# EAGLE board disp board (EAGLE 7.3.0)
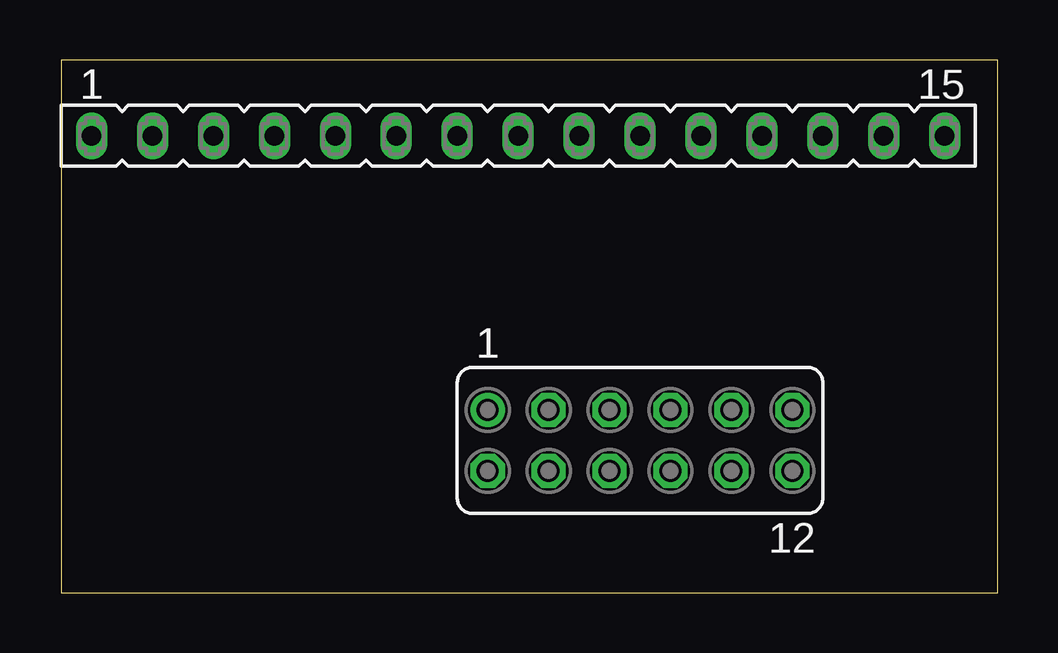
[diagram p0: board, top side]
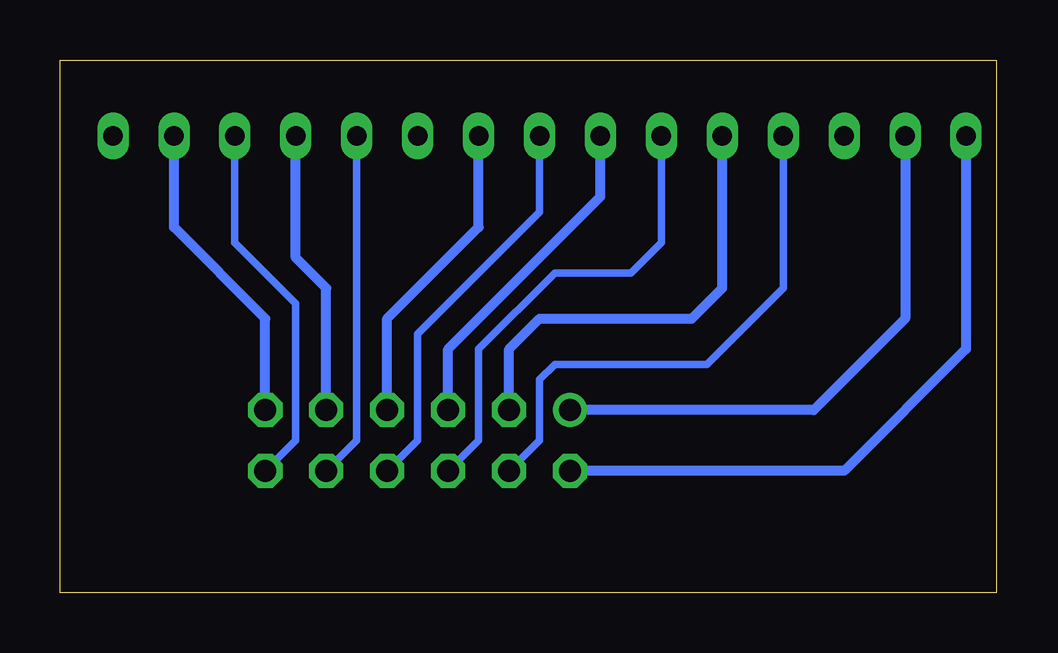
[diagram p1: board, bottom side, seen from below]

Size 39.04 x 22.21 mm. Coordinates in mm from the lower left corner, seen from the top.
Outline: 0,0 39.04,0 39.04,22.21 0,22.21 0,0
Copper layers (1*16): Top 0.035mm / dielectric 1.5mm / Bottom 0.035mm
Design rules "Othermill-DRC-1-32": minimum track width 8mil, minimum drill 0.8mm, track to track 0.794003125mm, track to pad 0.794003125mm, pad to pad 0.794003125mm, via to via 0.794003125mm, smd to smd 0mil, copper to edge 0mil, drill to drill 1mil, minimum pad ring 10mil, minimum via ring 10mil, stop-mask expansion 1mil, vias tented up to drill 30mil, thermal gap 10mil

## Footprints (pad centres in the part's own frame; a part is rotated, then mirrored left to right if it is on the bottom)
FE06-2 = drill 0.914: 1 -6.35,1.27 | drill 0.914 octagon: 2 -6.35,-1.27; 3 -3.81,1.27; 4 -3.81,-1.27; 5 -1.27,1.27; 6 -1.27,-1.27; 7 1.27,1.27; 8 1.27,-1.27; 9 3.81,1.27; 10 3.81,-1.27; 11 6.35,1.27; 12 6.35,-1.27
FE15 = drill 0.813 long: 1 -17.78,0; 2 -15.24,0; 3 -12.7,0; 4 -10.16,0; 5 -7.62,0; 6 -5.08,0; 7 -2.54,0; 8 0,0; 9 2.54,0; 10 5.08,0; 11 7.62,0; 12 10.16,0; 13 12.7,0; 14 15.24,0; 15 17.78,0

## Placement (x,y rotation side)
SV1  [FE06-2]  24.13,6.35 0 top
SV2  [FE15]  19.05,19.05 0 top

## Library data of the parts
SV1 SV2 = con-lsta; OC_FARNELL: unknown; OC_NEWARK: unknown

## Nets
CLK: SV1.4 SV2.4
CS: SV1.5 SV2.7
D/C: SV1.8 SV2.8
GND: SV1.2 SV2.1
MISO: SV1.3 SV2.5
MOSI: SV1.6 SV2.6
RST: SV1.7 SV2.9
VIN: SV1.1 SV2.2
X+: SV1.9 SV2.12
X-: SV1.11 SV2.14
Y+: SV1.10 SV2.11
Y-: SV1.12 SV2.13

## Tracks (layer width: path | path; a pad name or v marks a point on that pad's centre or on a via)
CLK
  Bottom 0.305: SV1.4 19.05,6.35 19.05,8.89 18.41,9.52 12.06,9.52 8.89,12.7 SV2.4
CS
  Bottom 0.406: SV1.5 22.86,10.16 16.51,16.51 SV2.7
D/C
  Bottom 0.305: SV2.8 19.05,15.88 24.13,10.8 24.13,6.35 SV1.8
GND
  Bottom 0.406: SV2.1 1.27,10.16 6.35,5.08 SV1.2
MISO
  Bottom 0.406: SV1.3 20.32,10.16 19.05,11.43 12.7,11.43 11.43,12.7 SV2.5
MOSI
  Bottom 0.305: SV2.6 13.97,14.61 15.24,13.34 18.41,13.34 21.59,10.16 21.59,6.35 SV1.6
RST
  Bottom 0.406: SV1.7 25.4,11.43 21.59,15.24 SV2.9
VIN
  Bottom 0.406: SV2.2 3.81,11.43 7.62,7.62 SV1.1
X+
  Bottom 0.406: SV1.9 27.94,12.7 29.21,13.97 SV2.12
X-
  Bottom 0.406: SV1.11 30.48,11.43 34.29,15.24 SV2.14
Y+
  Bottom 0.305: SV1.10 26.67,6.35 SV2.11
Y-
  Bottom 0.305: SV2.13 31.75,14.61 29.21,12.07 29.21,6.35 SV1.12

## Text on the board
tTest: GND | VIN | VIN | GND